# Altium PCB AMX_v30.PcbDoc
Units mil, origin at the board's own origin, x right, y up, seen from the top; angles counter-clockwise.
Board outline 2747.05 x 1800.98 mil, 4 copper layers (Top Layer, Internal Plane 1, Internal Plane 2, Bottom Layer), stack 30.634 mil thick; 78 components, 60 nets, 302 pads, 54 vias.
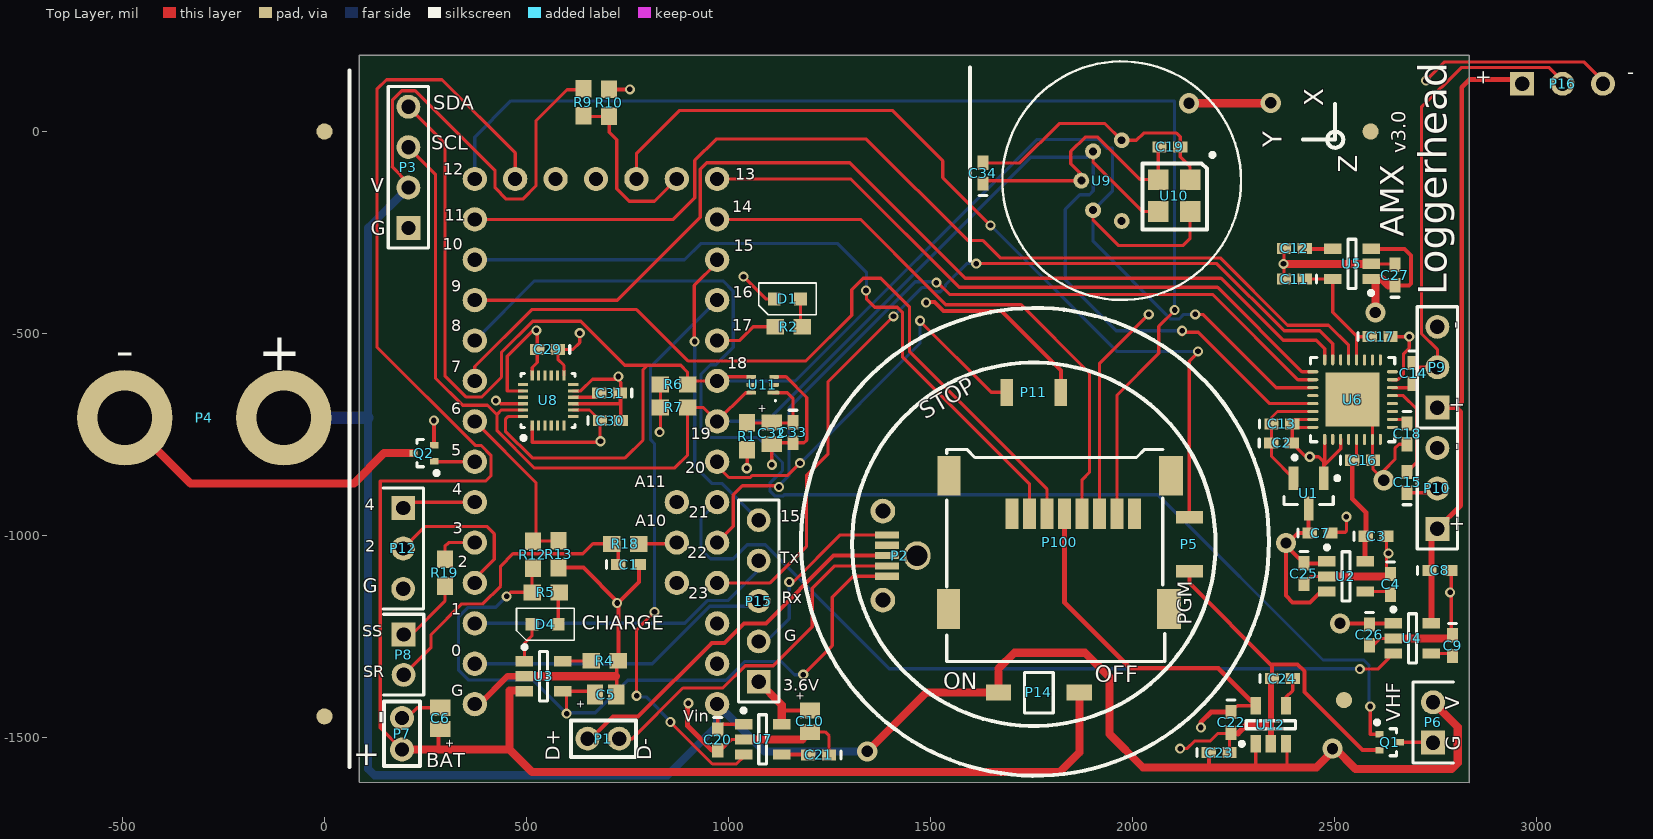
[diagram p0: Top Layer view]
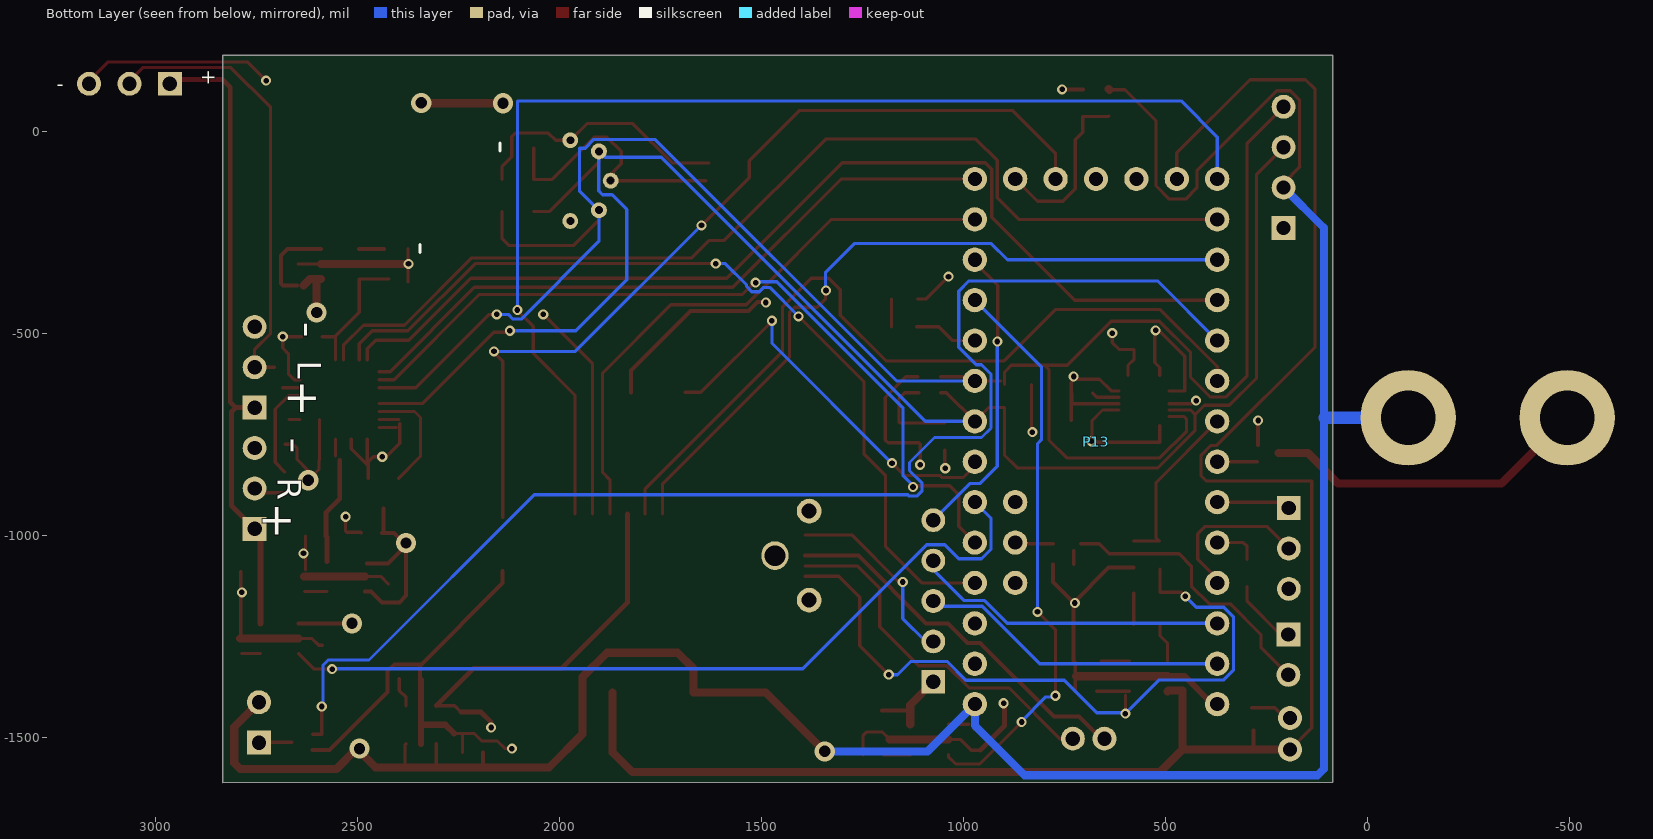
[diagram p1: Bottom Layer view, seen from below]
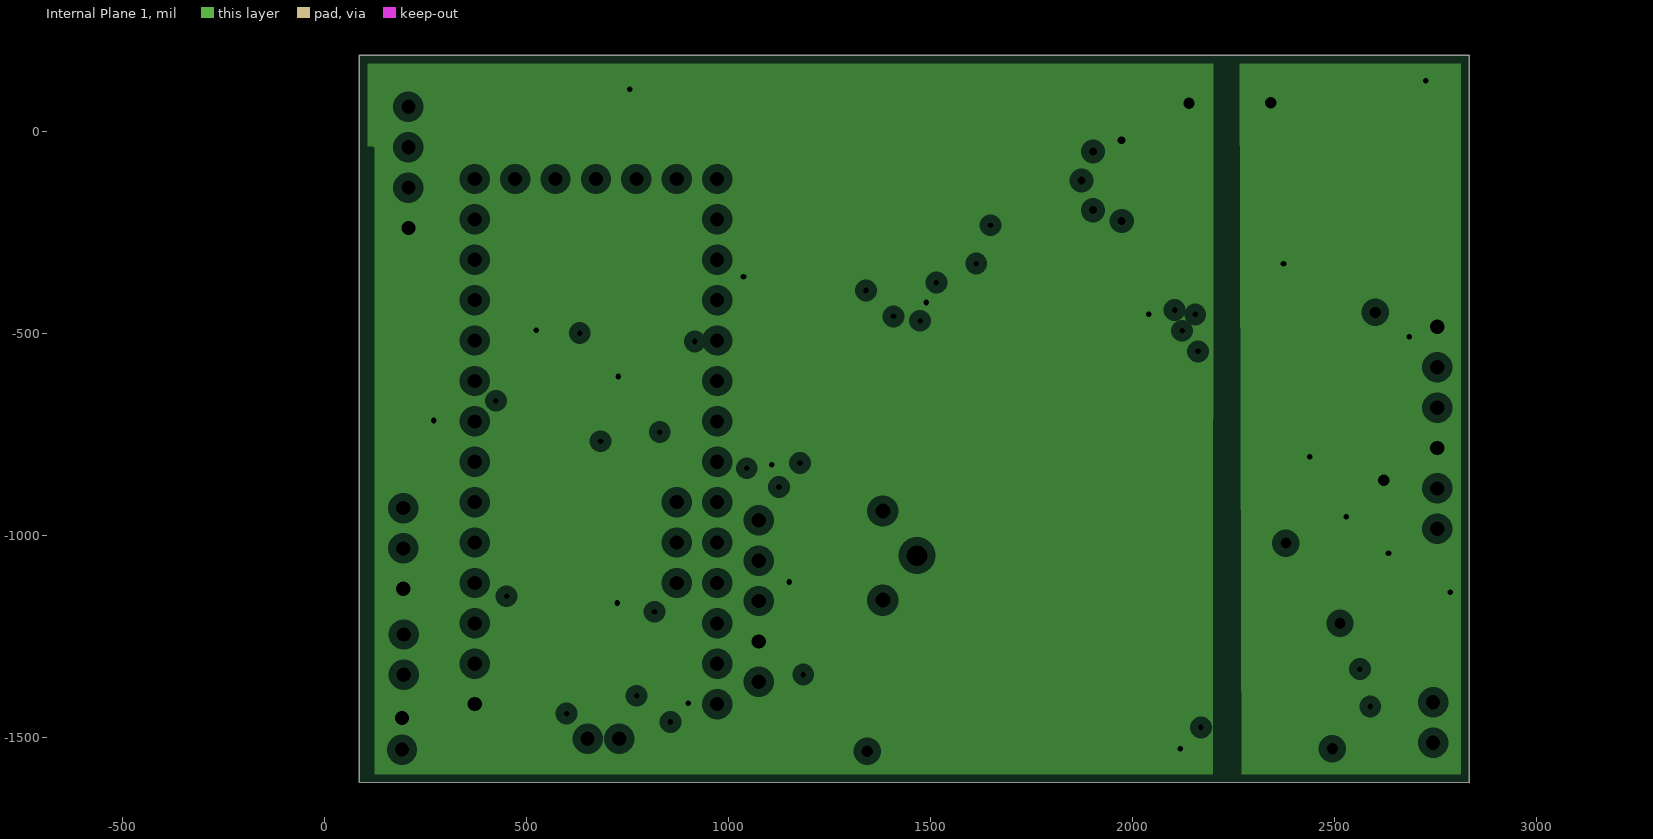
[diagram p2: Internal Plane 1, clearances drawn from the general rule]
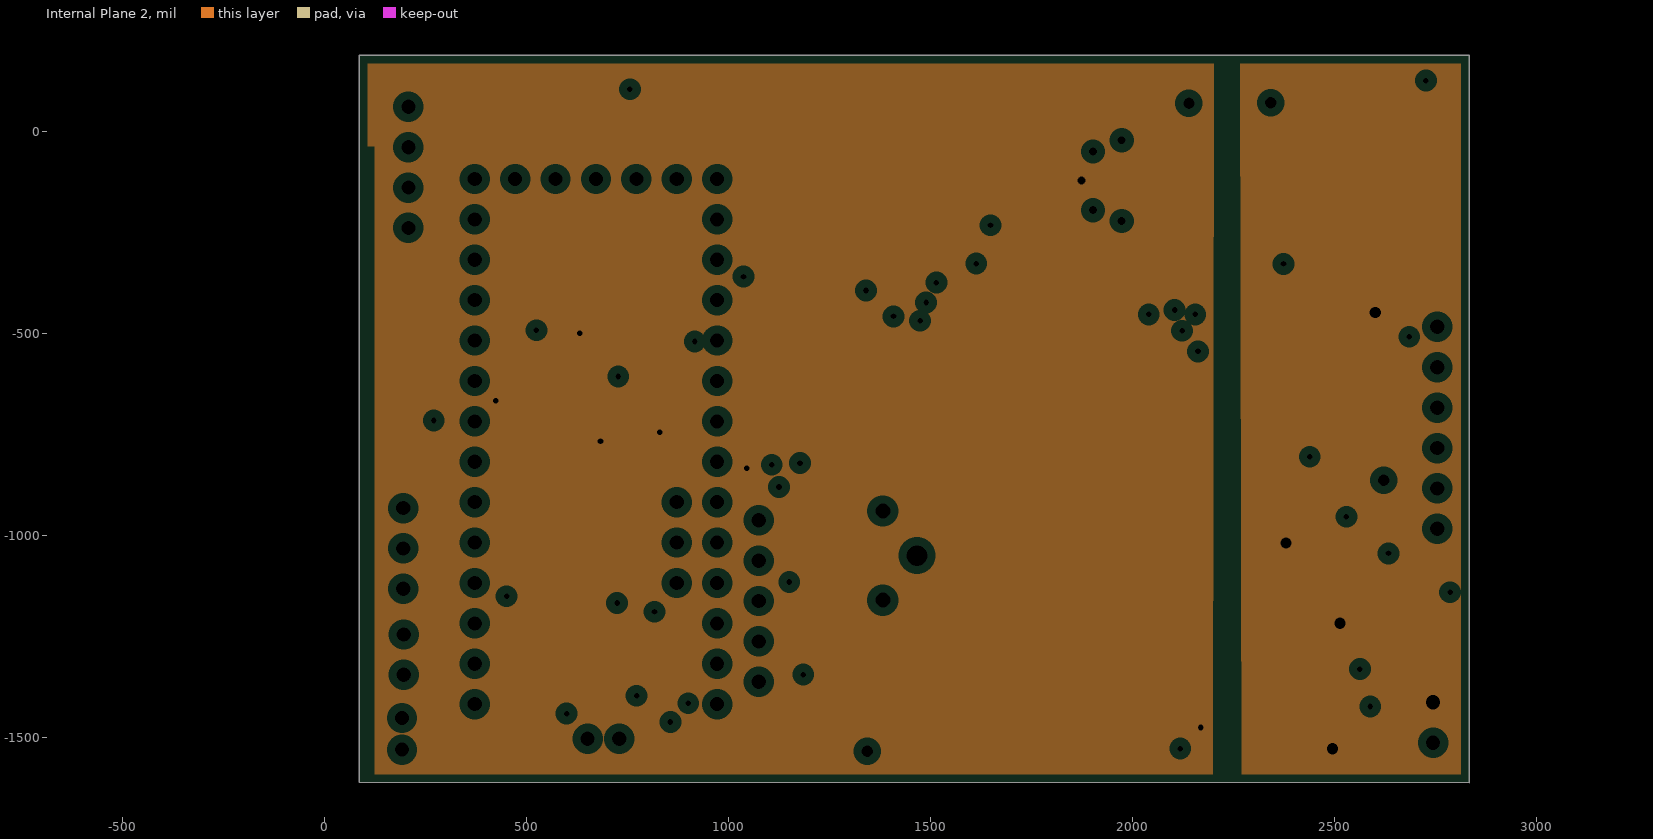
[diagram p3: Internal Plane 2, clearances drawn from the general rule]

## Layer stack, top to bottom
Top Solder: solder mask 0.4, Solder Resist, Dk 3.5
Top Layer: signal copper 1.4
Dielectric 1: core 10, FR-4, Dk 4.2
Internal Plane 1: plane copper 1.417, net DGND
Dielectric 3: prepreg 5, Dk 4.2
Internal Plane 2: plane copper 1.417, net (Multiple Nets)
Dielectric 2: core 10, Dk 4.2
Bottom Layer: signal copper 1.4
Bottom Solder: solder mask 0.4, Solder Resist, Dk 3.5

## Board outline
86.61,-1611.22 86.61,188.78 2833.66,188.78 2833.66,-1612.2

## Design rules (kind name [scope] priority, off if disabled: settings)
Clearance [All] p1: gap=6
HoleToHoleClearance [All] p1: gap=6 allowstackedmicrovias=TRUE
MinimumSolderMaskSliver [All] p1: minsoldermaskwidth=6
PlaneClearance [All] p1: clearance=20
PlaneConnect [All] p1: planeconnectstyle=Relief reliefexpansion=20 reliefentries=4 reliefconductorwidth=10 reliefairgap=10
PolygonConnect [All] p1: connectstyle=Relief reliefconductorwidth=10 reliefentries=4 polygonreliefangle="90 Angle" airgapwidth=10
RoutingVias [All] p1: holewidth=28 width=50 viastyle="Through Hole" minholewidth=10 minwidth=10 maxholewidth=100 maxwidth=200
SilkToSilkClearance [All] p1: silktosilkclearance=0
SilkToSolderMaskClearance [IsPad] p1: minsilkscreentomaskgap=2 clearancetoexposedcopper=TRUE
SolderMaskExpansion [All] p1: expansion=4
Width Width_1 [All] p1: maxlimit=50 minlimit=6 preferedwidth=8
Width [All] p2: maxlimit=100 minlimit=6 preferedwidth=10
23 further rules are at their usual default settings.

## Classes and differential pairs
component class AMX30: C2 C3 C4 C5 C6 C7 C8 C9 C10 C11 C12 C20 C21 C22 C23 C24 C25 C26 C27 D1 D4 P1 P2 P3 P5 P7 P11 P13 P14 P100 R2 R4 R5 R9 R10 R12 R13 U1 U2 U3 U4 U5 U7 U12
component class AMX_sensors30: C1 C19 C29 C30 C31 C32 C33 C34 P4 P6 P8 P12 P15 Q1 Q2 R1 R6 R7 R18 R19 U8 U9 U10
component class AMX_audio30: C13 C14 C15 C16 C17 C18 P9 P10 P16 U6

## Components (designator, comment, footprint, x,y, rotation, side; value= is the part's Value field where it differs from the comment)
C1 "1.0uF" 0402#1 752.95,-1071.85 r0 top
C2 "1.0uF" 0402#1 2369.09,-770.67 r0 top
C3 "1.0uF" 0402#1 2603.35,-1001.97 r0 top
C4 "10nF" 0402#1 2638.78,-1121.06 r270 top
C5 "1uF" Tant0805 695.87,-1393.7 r180 top
C6 "1uF" Tant0805 286.42,-1452.76 r270 top
C7 "1.0uF" 0402#1 2464.57,-994.09 r0 top
C8 "1.0uF" 0402#1 2760.83,-1086.61 r0 top
C9 "10nF" 0402#1 2792.32,-1272.64 r270 top
C10 "10uF" Tant0805 1201.77,-1459.65 r90 top
C11 "1.0uF" 0402#1 2400.59,-365.16 r180 top
C12 "10nF" 0402#2 2400.59,-289.37 r180 top
C13 "0.1uF" 0402#1 2369.85,-723.61 r0 top
C14 "1.0uF" 0402#1 2694.84,-598.62 r270 top
C15 "1.0uF" 0402#1 2679.84,-868.62 r90 top
C16 "0.1uF" 0402#1 2569.84,-813.62 r0 top
C17 "0.1uF" 0402#1 2613.19,-507.87 r0 top
C18 "0.1uF" 0402#1 2679.85,-748.61 r270 top
C19 "0.1uF" 0402#2 2092.52,-38.39 r0 top
C20 "1.0uF" 0402#1 973.43,-1505.91 r270 top
C21 "470pF" 0402#1 1223.43,-1543.31 r180 top
C22 "1.0uF" 0402#1 2244.09,-1462.6 r270 top
C23 "1.0uF" 0402#1 2214.57,-1537.4 r0 top
C24 "10nF" 0402#1 2371.06,-1354.33 r0 top
C25 "1.0uF" 0402#1 2424.21,-1094.49 r270 top
C26 "1.0uF" 0402#1 2586.61,-1246.06 r270 top
C27 "1.0uF" 0402#1 2649.61,-355.31 r90 top
C29 "0.1uF" 0402#1 552.17,-539.37 r180 top
C30 "10nF" 0402#1 707.68,-715.55 r0 top
C31 "0.1uF" 0402#1 705.71,-647.64 r180 top
C32 "1uF" Tant0805 1107.28,-747.05 r90 top
C33 "0.1uF" 0402#1 1159.45,-745.08 r270 top
C34 "0.1uF" 0402#1 1629.92,-103.35 r90 top
D1 "LED_0603" Diode0603 1145.67,-414.37 r180 top
D4 "LED_0603" Diode0603 546.26,-1219.49 r180 top
P1 "USB" HDR_2x1_2mm 650.59,-1502.95 r270 top
P2 "microUSB-vert" MICROUSB-VERT 1392.05,-1100.98 r90 top
P3 "Display" HDR1X4 207.8,-238.78 r90 top
P4 "Burn" BURN -100.39,-708.66 r180 top
P5 "Tactile" Tactile-B3U-1000 2140.75,-1021.65 r90 top
P6 "VHF Power" HDR1X2 2744.09,-1512.8 r90 top
P7 "Battery _2mm" HDR_2x1_2mm 191.93,-1530.51 r0 top
P8 "Salt Switch" HDR1X2 195.87,-1245.08 r270 top
P9 "HYDROPHONE" HDR1X3 2754.84,-683.62 r90 top
P10 "HYDROPHONE" HDR1X3 2754.84,-983.62 r90 top
P11 "Tactile" Tactile-B3U-1000 1755.91,-645.67 r180 top
P12 "Header 3" HDR1X3 194.88,-932.09 r270 top
P13 "Teensy3.x" Teensy3.x 372.05,-1217.52 r180 bottom
P14 "DIP1" DIP1 1868.43,-1388.38 r180 top
P15 "Header 5" HDR1X5 1074.8,-1362.2 r90 top (schematic designator P9)
P16 "HYDROPHONE" HDR1X3 2964.57,118.11 r0 top
P100 "microSD-Molex" microSD_Molex_hinged 2075.12,-851.97 r270 top
Q1 "DMN5L06TK-7" SOT-523 2636.81,-1511.81 r0 top
Q2 "DMN5L06TK-7" SOT-523 246.06,-796.26 r180 top
R1 "100x" 3-0603 1046.26,-754.92 r90 top
R2 "330" 3-0603 1149.61,-483.27 r0 top
R4 "2k" 3-0603 693.9,-1310.04 r180 top
R5 "330" 3-0603 547.24,-1140.75 r0 top
R6 "4.7k" 3-0603 865.16,-625.98 r0 top
R7 "4.7k" 3-0603 865.16,-683.07 r180 top
R9 "100k" 3-0603 640.75,71.85 r90 top
R10 "100k" 3-0603 704.72,70.87 r270 top
R12 "100k" 3-0603 515.75,-1047.24 r90 top
R13 "100k" 3-0603 579.72,-1046.26 r270 top
R18 "10k" 3-0603 744.09,-1020.67 r180 top
R19 "1k" 3-0603 298.23,-1092.52 r90 top
U1 "MCP1700T-1802E/TT" SOT-23-TT3_N 2436.02,-895.67 r270 top
U2 "LP3985IM5-3.3" MF05A_N 2528.54,-1101.38 r0 top
U3 "MCP73831T-2DCI/OT" SOT-23-OT5_N 542.32,-1348.43 r0 top
U4 "LP3985IM5-3.3" MF05A_N 2692.91,-1254.92 r0 top
U5 "LP3985IM5-3.3" MF05A_N 2543.31,-327.76 r180 top
U6 "SGTL5000" QFN32 2544.85,-663.61 r90 top
U7 "3.6V LDO" MF05A_N 1084.65,-1504.92 r0 top
U8 "MPU9250" MPU6500 553.57,-665.85 r90 top
U9 "Keller7LD" Keller7LD 1973.43,-21.65 r270 top
U10 "MS5837" MS5837 2142.72,-119.09 r270 top
U11 "RGB light" ODFN 1084.65,-626.97 r180 top
U12 "LP3985IM5-3.3" MF05A_N 2342.52,-1468.5 r90 top

## Footprints (in the part's own frame and the unit in brackets; to place one, negate y for a bottom-side part, rotate by r counter-clockwise, add the part's x,y. Pads: shape width x height; smd on the part's side, far side on the other; paste and mask are expansions set on the pad)
3-0603 [mm] "Chip Resistor; Body 1.6 x 0.9 mm (LxW typ)"
  rect 1.1x1 smd: 1(-0.85,0) 2(0.85,0)
0402#1 [mm] "Chip Capacitor; Body 1.0 x 0.5 mm (LxW typ)"
  rect 0.9x0.7 smd: 1(-0.65,0) 2(0.65,0)
  silkscreen extent -1.4,-0.25 -1.4,0.25
0402#2 [mm] "Chip Capacitor; Body 1.0 x 0.5 mm (LxW typ)"
  rect 0.9x0.7 smd: 1(0.65,0) 2(-0.65,0)
BURN [mm]
  round 6 hole 3.42: 1(0,0) 2(10,0)
Diode0603 [mm]
  rect 0.8x0.8 smd: A(-0.825,0) K(0.825,0)
  silkscreen extent -1.83,-1 1.8,1
DIP1 [mm]
  rect 1.6x1 smd: 1(0,0) 2(5.08,0)
  silkscreen extent 1.63,-1.25 3.45,1.29
HDR1X2 [mm] "Connector; Header; 2 Position"
  rect 1.5x1.5 hole 0.9: 1(0,0)
  round 1.5 hole 0.9: 2(2.54,0)
  silkscreen extent -1.27,-1.27 3.81,1.27
HDR1X3 [mm] "Connector; Header; 3 Position"
  rect 1.5x1.5 hole 0.9: 1(0,0)
  round 1.5 hole 0.9: 2(2.54,0) 3(5.08,0)
  silkscreen extent -1.27,-1.27 6.35,1.27
HDR1X4 [mm] "Connector; Header; 4 Position"
  rect 1.5x1.5 hole 0.9: 1(0,0)
  round 1.5 hole 0.9: 2(2.54,0) 3(5.08,0) 4(7.62,0)
  silkscreen extent -1.27,-1.27 8.89,1.27
HDR1X5 [mm] "Connector; Header; 5 Position"
  rect 1.5x1.5 hole 0.9: 1(0,0)
  round 1.5 hole 0.9: 2(2.54,0) 3(5.08,0) 4(7.62,0) 5(10.16,0)
  silkscreen extent -1.27,-1.27 11.43,1.27
HDR_2x1_2mm [mm]
  round 1.5 hole 0.9: 1(0,0.016) 2(0,2)
  silkscreen extent -1.14,-1.02 1.14,3.05
Keller7LD [mm]
  round 1 hole 0.5: 1(5.08,0) 2(4.4,-1.8) 3(2.54,-2.54) 4(0.7,-1.8) 5(0,0)
  silkscreen extent -4.96,-7.5 10.04,7.5, body extent -4.94,-7.49 10,7.49, height 5.25
MF05A_N [mm] "SOT23, 5-Leads, Body 2.9x1.6mm, Pitch 0.95mm, Lead Span 2.8mm, IPC Medium Density"
  rect 1.1x0.65 smd: 1(-1.2,0.95) 2(-1.2,0) 3(-1.2,-0.95) 4(1.2,-0.95) 5(1.2,0.95)
  silkscreen extent -1.32,-1.55 0.25,1.95, body extent -0.9,-1.55 0.9,1.55, height 1.19
microSD_Molex_hinged [mm]
  rect 2.5x1.5 smd: 0(0,0.508) 0(8.382,0.381)
  rect 2.5x1.45 smd: 0(0,-13.45) 0(8.382,-13.462)
  rect 1.9x0.8 smd: 1(2.4,-9.475) 2(2.4,-8.375) 3(2.4,-7.275) 4(2.4,-6.175) 5(2.4,-5.075) 6(2.4,-3.975) 7(2.4,-2.875) 8(2.4,-1.775)
  silkscreen extent -1.65,-13.59 11.68,0.13
MICROUSB-VERT [mm] "Molex 05133-0011"
  rect 0.45x1.5 smd: 1(0,0) 2(0.65,0) 3(1.3,0) 4(1.95,0) 5(2.6,0)
  round 1.55 hole 0.95: ""(-1.5,0.25) ""(4.1,0.25)
  oval 1.8x1.7 hole 1.3: ""(1.3,-1.9)
  body extent -2.67,-3.05 5.35,1.4, height 7.53
MPU6500 [mm] "QFN, 24-Leads, Body 3.00x3.00mm, Pitch 0.40mm, Thermal Pad 1.54x1.54mm, IPC Medium Density"
  rect 0.65x0.2 smd: 1(-1.575,1) 2(-1.575,0.6) 3(-1.575,0.2) 4(-1.575,-0.2) 5(-1.575,-0.6) 6(-1.575,-1) 13(1.575,-1) 14(1.575,-0.6) 15(1.575,-0.2) 16(1.575,0.2) 17(1.575,0.6) 18(1.575,1)
  rect 0.2x0.65 smd: 7(-1,-1.575) 8(-0.6,-1.575) 9(-0.2,-1.575) 10(0.2,-1.575) 11(0.6,-1.575) 12(1,-1.575) 19(1,1.575) 20(0.6,1.575) 21(0.2,1.575) 22(-0.2,1.575) 23(-0.6,1.575) 24(-1,1.575)
  silkscreen extent -2.47,-1.7 1.7,1.7, body extent -1.85,-1.25 1.25,1.85, height 0.9
MS5837 [mm]
  rect 1.3x1.3 smd: 1(0,0) 2(0,-2) 3(2,-2) 4(2,0)
  silkscreen extent -1.67,-3 3.15,1.52
ODFN [mm]
  rrect50% 0.75x0.25 smd: 1(-0.67,0.5)
  rrect50% 0.6x0.25 smd: 2(-0.72,0) 3(-0.72,-0.5) 4(0.72,-0.5) 5(0.72,0) 6(0.72,0.5)
  silkscreen extent -0.85,0.95 -0.75,1.05, body extent -0.82,-0.82 0.82,0.82, height 0.7
QFN32 [mm]
  oval 0.7x0.2 smd: 1(-2.5,1.75) 2(-2.5,1.25) 3(-2.5,0.75) 4(-2.5,0.25) 5(-2.5,-0.25) 6(-2.5,-0.75) 7(-2.5,-1.25) 8(-2.5,-1.75) 17(2.5,-1.75) 18(2.5,-1.25) 19(2.5,-0.75) 20(2.5,-0.25) 21(2.5,0.25) 22(2.5,0.75) 23(2.5,1.25) 24(2.5,1.75)
  oval 0.2x0.7 smd: 9(-1.75,-2.5) 10(-1.25,-2.5) 11(-0.75,-2.5) 12(-0.25,-2.5) 13(0.25,-2.5) 14(0.75,-2.5) 15(1.25,-2.5) 16(1.75,-2.5) 25(1.75,2.5) 26(1.25,2.5) 27(0.75,2.5) 28(0.25,2.5) 29(-0.25,2.5) 30(-0.75,2.5) 31(-1.25,2.5) 32(-1.75,2.5)
  rect 3.4x3.4 smd paste-1.2: 33(0,0)
  silkscreen extent -3.77,-2.65 2.65,3.76, body extent -2.5,-2.5 2.5,2.5, height 1
SOT-23-OT5_N [mm] "SOT23, 5-Leads, Body 2.9x1.7mm, Pitch 0.95mm, Lead Span 2.8mm, IPC Medium Density"
  rect 1.1x0.65 smd: 1(-1.2,0.95) 2(-1.2,0) 3(-1.2,-0.95) 4(1.2,-0.95) 5(1.2,0.95)
  silkscreen extent -1.32,-1.55 0.25,1.95, body extent -0.9,-1.55 0.9,1.55, height 1.45
SOT-23-TT3_N [mm] "SOT23, 3-Leads, Body 2.9x1.3mm, Pitch 0.95mm, Lead Span 2.4mm, IPC Medium Density"
  rect 1.5x0.6 smd: 1(-0.95,0.95) 2(-0.95,-0.95) 3(0.95,0)
  silkscreen extent -1.07,-1.55 0.7,1.93, body extent -0.7,-1.52 0.7,1.53, height 1.12
SOT-523 [mm] "For Diodes Inc MOSFET DMN5L06TK"
  rect 0.51x0.4 smd: 1(-0.65,0.5) 2(-0.65,-0.5) 3(0.65,0)
  silkscreen extent -0.92,-0.85 0.42,1.37, body extent -0.43,-0.85 0.42,0.85, height 0.8
Tactile-B3U-1000 [mm]
  rect 0.8x1.7 smd: 1(-1.7,0) 2(1.7,0)
Tant0805 [mil]
  rect 40x50 smd: 1(-26.5,0) 2(26.5,0)
Teensy3.x [mil]
  round 60 hole 35: 0(0,-100) 1(0,0) 2(0,100) 3(0,200) 3.3V(-600,0) 3.3V2(-200,1100) 4(0,300) 5(0,400) 6(0,500) 7(0,600) 8(0,700) 9(0,800) 10(0,900) 11(0,1000) 12(0,1100) 13(-600,1100) 14(-600,1000) 15(-600,900) 16(-600,800) 17(-600,700) 18(-600,600) 19(-600,500) 20(-600,400) 21(-600,300) 22(-600,200) 23(-600,100) A10(-500,200) A11(-500,300) A14(-500,1100) AGND(-600,-100) AREF(-500,100) GND(0,-200) GND2(-300,1100) PGM(-400,1100) VBat(-100,1100) Vin(-600,-200)

## Part data
C1 C2 C3 C4 C7 C8 C9 C11 C12 C13 C14 C15 C16 C17 C18 C19 C20 C21 C22 C23 C24 C25 C26 C27 C29 C30 C31 C33 C34: library part C0402, "Ceramic Chip Capacitor - Standard"
C5 C6 C10 C32: library part Tant0805
P1 P7: library part HDR_2x1_2mm, "Charging Connector"
P2: "Molex 105133-0011"
P3: library part "Header 4", "Header, 4-Pin"
P4: library part "Burn Screw"
P5 P11: library part Tactile_B3U-1000
P6 P8: library part "Header 2", "Header, 2-Pin"
P9 P10 P16: library part "Header 3", "Header, 3-Pin"
P12: "Header, 3-Pin"
P15: "Header, 5-Pin"
P100: library part microSD_Molex_hinged
Q1 Q2: library part "FET DMN5L06TK-7", "Ultra-low leakage Enhanced MOSFET"
R1 R2 R4 R5 R6 R7 R9 R10 R12 R13 R18 R19: library part ERJ3RK, "Precision Thick Film Chip Resistor, 10 Ohm to 1M Ohm Range, 1% and 0.5% Tolerance, 0603 Size, 0.063 W"
U1: "Low Quiescent Current LDO, 3-Pin SOT-23, Extended Temperature, Tape and Reel"
U2 U4 U5 U12: "Micropower, 150mA Low-Noise Ultra Low-Dropout CMOS Voltage Regulator"
U3: "Miniature Single-Cell, Fully Integrated Li-Ion, Li-Polymer Charge Management Controller, 4.2V, 5-Pin SOT-23, Industrial Temperature, Tape and Reel"
U7: library part LP3985IM5-3.3, "Micropower, 150mA Low-Noise Ultra Low-Dropout CMOS Voltage Regulator"
U8: library part MPU-9250, "Invensense"
U9: library part "Keller 7LD", "Keller Pressure/Temp"
U10: "Pressure/Temp"
U11: library part ISL29125, "RGB light sensor"

## Free pads (board coordinates)
  round 40 smd paste-20 mask+5: 0(0,-1447.83) 0(0,0) 0(2523.62,-1407.48) 0(2589.57,0)

## Via types
v1: diameter 25, hole 14, Top Layer to Bottom Layer, 46 vias
v2: diameter 50, hole 28, Top Layer to Bottom Layer, 8 vias

## Nets (pads, with @x,y where several pads share a name; then routed paths per layer and width w, separated by ;. In a path a pad name is that pad's centre, name@x,y a point inside that pad or via, vN(x,y) a via of type N, cw(c..) or ccw(c..) an arc to the next point about the centre after c; other vN are vias at no path point)
AGND: C2.2 C3.2 C4.1 C7.2 C8.2 C9.1 C11.2 C12.1 C13.2 C16.2 C17.2 C18.2 C25.2 C26.2 C27.2 P9.3 P10.3 P16.3 U1.1 U2.2 U4.2 U5.2 U6.1 U6.3 U6.7 U6.15 U6.31 U6.32 U6.33 | length 2451.6
  Top Layer w8: C11.2@2375,-372.05 C11.2 2375,-318.9 C12.1 ; C2.2 2429.13,-805.12 v1(2438.98,-805.12) 2460.63,-805.12 2473.43,-817.91 U1.1 ; C2.2@2395.44,-769.91 C13.2 ; C13.2@2397.86,-712.82 U6.31 ; C13.2@2404.34,-732.51 U6.32 ; C25.2 2442.91,-1101.38 U2.2 ; U6.1 2475.96,-824.8 2515.33,-785.43 U6.3 ; C7.2 2492.13,-992.13 2526.57,-992.13 2529.53,-989.17 v1(2529.53,-953.74) ; C26.2 2596.46,-1271.65 2613.19,-1254.92 U4.2 ; U5.2 C27.2@2647.64,-327.76 ; C16.2@2594.07,-812.26 U6.7 U6.33@2594.07,-712.82 ; C16.2 2595.43,-836.57 v2(2622.05,-863.19) 2622.05,-839.57 2649.61,-812.01 2649.61,-784.45 2659.86,-774.2 C18.2 ; C4.1@2628.94,-1085.63 C3.2 ; C17.2 v1(2685.04,-507.87) 2685.04,-536.01 2671.06,-549.99 2671.06,-599.61 2656.27,-614.4 U6.15 ; v1(2726.38,125.98) 2772.64,172.24 3117.32,172.24 P16.3@3160.63,128.94 ; C9.1@2789.37,-1248.03 C8.2@2789.37,-1089.57
  Top Layer w20: v1@2375.98,-327.76 U5.2 ; U2.2 C4.1@2632.87,-1101.38 ; U4.2 C9.1@2790.35,-1254.92
  other v1: 2786.42,-1140.75 2633.86,-1044.29 2374.02,-327.76
  other v2: 2342.52,70.87
BCLK: P13.9 U6.24 | length 2532.4
  Top Layer w8: P13.9 725.2,-417.52 930.34,-212.38 930.34,-93.28 946.1,-77.52 1299.96,-77.52 1585.63,-363.19 2219.49,-363.19 2373.03,-516.73 2454.72,-516.73 2475.96,-537.96 U6.24
BURN: P13.5 Q2.1 | length 98.8
  Top Layer w8: Q2.1@273.23,-817.52 P13.5
BURN_GND: P4.2 Q2.3 | length 812.8
  Top Layer w20: P4.2 -331.69,-871.06 72.83,-871.06 147.64,-796.26 Q2.3
CAM_SW: P12.1 P13.4 | length 183.2
  Top Layer w8: P12.1 209.45,-917.52 P13.4
CS: P13.10 P100.2 | length 1813.2
  Top Layer w8: v1@1341.54,-394.69 1341.54,-414.37 1362.34,-435.18 1417.78,-435.18 1430.96,-448.36 1430.96,-558.92 1745.4,-873.35 P100.2
  Bottom Layer w8: P13.10 891.14,-317.52 931.14,-277.52 1270.63,-277.52 1341.54,-348.43 v1@1341.54,-394.69
  other v1: 1340.55,-393.7
D2: P12.2 P13.2 | length 397.1
  Top Layer w8: P12.2 249.45,-977.52 401.73,-977.52 420.28,-996.06 420.28,-1059.06 372.05,-1107.28 P13.2
D15: P13.15 P15.5 | length 749.4
  Top Layer w8: v1@915.35,-520.67 915.35,-380.91 972.05,-324.21 P13.15
  Bottom Layer w8: v1(916.34,-519.69) 916.34,-828.74 958.66,-871.06 983.66,-871.06 P15.5
D+: P1.1 P2.3 | length 937
  Top Layer w10: P1.1@659.45,-1502.95 714.57,-1447.83 776.57,-1447.83 958.66,-1265.75 990.2,-1265.75 1038.43,-1217.52 1092.52,-1217.52 1260.24,-1049.8 P2.3
  Top Layer w20: P1.1@651.22,-1494.45 P1.1 P1.1@659.45,-1502.95
D-: P1.2 P2.2 | length 895.7
  Top Layer w8: P1.2 761.81,-1502.95 887.24,-1377.52 986.29,-1377.52 1041.13,-1322.68 1111.38,-1322.68 1207.68,-1226.38 1207.68,-1130.91 1263.19,-1075.39 P2.2
DGND: C1.2 C5.1 C6.1 C10.1 C19.1 C20.2 C21.1 C22.2 C23.2 C24.1 C29.2 C30.2 C31.1 C32.1 C33.2 C34.2 D1.K P2.5 P3.1 P5.1 P7.2 P11.1 P12.3 P13.GND P15.2 P100.6 Q1.2 Q2.2 R4.1 R10.1 R13.2 U3.2 U7.2 U8.9 U8.11 U8.18 U8.20 U9.5 U10.1 U11.3 U12.2 | length 6143.7
  Top Layer w8: P7.2 203.74,-1451.77 229.26,-1426.26 C6.1 ; P13.GND P13.GND@383.66,-1417.52 ; U8.20 452.27,-642.23 452.27,-556.59 514.76,-494.09 526.57,-494.09 C29.2 526.57,-571.85 514.2,-584.23 U8.18 ; U8.9 728.83,-673.72 731.3,-671.26 C31.1 ; U8.11 634.35,-642.23 663.39,-613.19 725.39,-613.19 733.27,-621.06 C30.2 ; C5.1@723.35,-1385.83 R4.1@723.35,-1314.05 ; v1@898.62,-1421.26 v1@904.53,-1415.35 ; 958.66,-1531.5 C20.2 981.3,-1531.5 1007.87,-1504.92 U7.2 ; v1(1037.4,-359.25) 1092.52,-414.37 D1.K ; v1(1107.28,-824.8) C32.1 ; C32.1@1110.16,-770.67 C33.2 1187.01,-770.67 1193.9,-763.78 1193.9,-658.46 1142.72,-607.28 U11.3 ; v1@1150.59,-1117.13 1158.46,-1117.13 1276.97,-998.62 P2.5 ; C10.1@1183,-1504.92 C10.1 1239.1,-1486.15 1249.02,-1496.06 C21.1 ; C34.2 1721.46,-77.76 1818.9,19.69 1932.09,19.69 U9.5 2009.84,-21.65 2027.56,-3.94 2109.25,-3.94 2118.11,-12.8 C19.1 2118.11,-62.99 2142.72,-87.6 U10.1 ; P100.6 1918.63,-573.5 v1@2042.32,-449.8 ; v1(2118.11,-1527.56) 2134.84,-1527.56 2153.54,-1508.86 2191.93,-1508.86 2210.63,-1490.16 2260.83,-1490.16 ; C23.2 C22.2@2240.16,-1492.13
  Top Layer w10: Q2.2 v1@271.65,-716.54 ; R13.2 640.75,-1079.72 v1@726.38,-1165.35 ; R10.1 v1(755.91,104.33) ; R4.1 727.36,-1166.34 778.54,-1115.16 C1.2 ; v1@1490.16,-422.24 1509.96,-422.24 1531.85,-444.13 1675.43,-444.13 1822.83,-591.54 P11.1 ; P5.1 2140.75,-1118.11 2345.47,-1322.83 C24.1 2345.47,-1318.9 2408.27,-1318.9 2425.37,-1335.99 2425.37,-1386.98 2569.88,-1531.5 Q1.2
  Top Layer w12: v1@898.62,-1421.26 898.62,-1471.46 958.66,-1531.5
  Top Layer w15: P13.GND@383.66,-1417.52 452.76,-1348.43 U3.2 ; 2260.83,-1490.16 2282.48,-1468.5 2342.52,-1468.5 ; U12.2 2342.52,-1468.5 ; C24.1@2342.52,-1357.28 2342.52,-1468.5
  Top Layer w20: U3.2 721.38,-1348.43 ; U7.2 C10.1@1183,-1504.92
  Bottom Layer w8: P15.2 1094.09,-1262.2 1150.59,-1205.71 v1(1150.59,-1115.16)
  other v1: 900.59,-1415.35 724.41,-1167.32 270.67,-715.55 727.36,-606.3 524.61,-492.13 2040.35,-452.76 1489.17,-423.23
  other v2: 2139.76,69.88
HL: C14.1 P9.2 P16.2 | length 1107.3
  Top Layer w8: C14.1@2705.43,-583.62 P9.2 2754.84,-539.52 2715.31,-499.99 2715.31,59.8 2813.58,158.07 3031.5,158.07 P16.2@3060.63,128.94
HYDRO_EN: P13.21 U4.3 | length 2015
  Top Layer w8: v1(2562.99,-1330.71) 2607.28,-1330.71 U4.3
  Bottom Layer w8: P13.21 932.05,-957.52 932.05,-1034.09 955.48,-1057.52 1011.84,-1057.52 1046.69,-1022.68 1091.18,-1022.68 1398.22,-1329.72 v1@2563.98,-1329.72
I2SDIN: P13.22 U6.26 | length 2009.8
  Top Layer w8: P13.22 1012.05,-977.52 1012.05,-899.37 1034.45,-876.97 v1@1125,-876.97 ; v1@1516.73,-373.03 1547.24,-403.54 2198.82,-403.54 2409.67,-614.4 U6.26 U6.26@2445.67,-615.16
  Bottom Layer w8: P13.22 P13.22@972.05,-992.52 ; v1@1125,-876.97 1149.61,-852.36 1149.61,-684.72 1462.27,-372.05 v1@1514.76,-372.05
  other v1: 1125,-879.92 1514.76,-374.02
I2SDOUT: P13.13 U6.25 | length 1672
  Top Layer w8: P13.13 1302.56,-117.52 1570.87,-385.83 2210.63,-385.83 2419.51,-594.71 U6.25
IN_L: C14.2 U6.14 | length 41.7
  Top Layer w8: U6.14 C14.2@2684.97,-634.08
IN_R: C15.2 U6.13 | length 240.1
  Top Layer w8: U6.13 2670.5,-653.77 2703.63,-686.9 2703.63,-819.24 C15.2
LED1: P13.17 R2.1 | length 158.3
  Top Layer w8: P13.17 1026.77,-517.52 1061.02,-483.27 R2.1
LINE_IN_R: C15.1 P10.2 | length 79.4
  Top Layer w8: C15.1 2744.25,-894.21 P10.2
LRCLK: P13.23 U6.23 | length 2191.9
  Top Layer w8: P13.23 1102.95,-1117.52 1192.91,-1027.56 1192.91,-852.36 1246.06,-799.21 1246.06,-620.08 v1(1408.46,-457.68) ; v1(1613.41,-326.99) 2208.88,-326.99 2375.22,-493.33 2463.8,-493.33 2495.64,-525.17 U6.23
  Bottom Layer w8: v1(1408.46,-457.68) 1480.09,-386.05 1494.98,-386.05 1505.44,-396.52 1524.08,-396.52 1537.26,-383.34 1537.26,-379.07 1589.35,-326.99 v1(1613.41,-326.99)
MCLK: P13.11 U6.21 | length 2547.1
  Top Layer w8: P13.11 863.19,-217.52 916.34,-164.37 916.34,-71.72 969.36,-18.7 1341.54,-18.7 1592.52,-269.69 1628.94,-269.69 1672.24,-312.99 2217.52,-312.99 2383.86,-479.33 2485.24,-479.33 2535.01,-529.11 U6.21
MISO: P13.12 P100.7 | length 2954.4
  Top Layer w8: P100.7 1961.93,-652.24 2065.13,-549.04 2065.13,-482.46 v1@2105.31,-442.27
  Bottom Layer w8: P13.12 372.05,-13.78 461.61,75.79 2104.33,75.79 v1(2104.33,-441.93)
MOSI: P13.7 P100.3 | length 2027.2
  Top Layer w8: P13.7 372.05,-581.69 512.8,-440.94 772.64,-440.94 899.61,-567.91 1191.93,-567.91 1305.12,-454.72 1305.12,-391.73 1333.66,-363.19 1376.97,-363.19 1447.83,-434.06 1447.83,-544.29 1788.39,-884.84 1788.39,-946.13 P100.3
NetC1_1: C1.1 P8.2 R18.2 | length 731.2
  Top Layer w8: P8.2 263.78,-1277.17 263.78,-1245.08 339.57,-1169.29 391.73,-1169.29 435.84,-1125.18 435.84,-1075.97 466.38,-1045.43 639.61,-1045.43 664.37,-1020.67 R18.2 ; C1.1 R18.2@727.36,-1037.4
NetC4_2: C4.2 U2.4 | length 55.1
  Top Layer w8: U2.4 C4.2@2630.91,-1138.78
NetC9_2: C9.2 U4.4 | length 46.3
  Top Layer w8: U4.4 C9.2@2786.42,-1292.32
NetC12_2: C12.2 U5.4 | length 62
  Top Layer w10: C12.2@2434.06,-290.35 U5.4
NetC18_1: C18.1 U6.10 | length 26.4
  Top Layer w8: U6.10 C18.1@2669.66,-712.82
NetC21_2: C21.2 U7.4 | length 65
  Top Layer w10: U7.4 C21.2@1196.85,-1542.32
NetC24_2: C24.2 U12.4 | length 73.9
  Top Layer w8: U12.4 2379.92,-1400.59 2396.65,-1383.86 C24.2
NetC31_2: C31.2 U8.10 | length 68.8
  Top Layer w8: U8.10 669.78,-657.98 C31.2
NetC32_2: C32.2 C33.1 R1.2 U11.1 | length 224.4
  Top Layer w8: R1.2 C33.1@1157.48,-721.46 ; U11.1 1145.67,-646.65 1159.45,-660.43 C33.1
NetD1_A: D1.A R2.2 | length 68.9
  Top Layer w8: R2.2@1178.15,-483.27 D1.A
NetD4_A: D4.A R5.2 | length 76.8
  Top Layer w8: D4.A R5.2@578.74,-1142.72
NetD4_K: D4.K U3.1 | length 99.3
  Top Layer w8: U3.1 495.08,-1266.73 513.78,-1248.03 D4.K
NetP8_1: P8.1 R19.1 | length 173
  Top Layer w8: P8.1 215.55,-1245.08 298.23,-1162.4 R19.1
NetP13_6: P13.6 R12.2 R13.1 | length 425.3
  Top Layer w8: P13.6 523.62,-869.09 523.62,-1005.91 R12.2 R13.1@578.74,-1013.78
NetR4_2: R4.2 U3.5 | length 69.9
  Top Layer w8: U3.5 R4.2@659.45,-1311.02
PGM: P5.2 P13.PGM | length 2179.6
  Top Layer w8: P13.PGM 772.05,-54.72 878.94,52.17 1405.51,52.17 1530.51,-72.83 1530.51,-114.17 v1@1646.65,-230.31 ; P5.2 2140.75,-568.9 v1@2160.43,-549.21
  Bottom Layer w8: v1(1648.62,-232.28) 1960.63,-544.29 v1(2162.4,-544.29)
POW_EN: P13.16 U7.3 | length 1408
  Top Layer w8: v1(772.64,-1396.65) 772.64,-1233.27 v1(816.93,-1188.98) ; v1(856.3,-1461.61) 960.31,-1565.63 1019.69,-1565.63 1037.4,-1547.91 U7.3
  Bottom Layer w8: v1@777.56,-1399.61 796.26,-1399.61 v1@857.28,-1460.63 ; v1@816.93,-1185.04 816.93,-772.82 807.22,-763.12 807.22,-582.34 P13.16
RX: P13.0 P15.3 | length 767.1
  Bottom Layer w8: P13.0 811.42,-1317.52 953.74,-1175.2 1061.81,-1175.2 P15.3
SALT_READ: P13.A10 R18.1 | length 91.3
  Top Layer w8: R18.1 P13.A10@868.9,-1020.67
SALT_SIG: P13.3 R19.2 | length 110
  Top Layer w8: R19.2 298.23,-1026.57 307.28,-1017.52 P13.3
SCK: P13.14 P100.5 | length 1435.3
  Top Layer w8: P13.14 1326.77,-217.52 1492.26,-383.01 1492.26,-383.34 1538.06,-429.13 1724.41,-429.13 1893.7,-598.43 1893.7,-843.5 1875.32,-861.88 P100.5
SCL: P3.3 P13.19 R7.1 U6.29 U8.23 U9.4 U10.3 U11.6 | length 4287.7
  Top Layer w8: P3.3 274.61,-105.58 274.61,-610.24 341.89,-677.52 403.57,-677.52 425.86,-699.8 427.17,-699.8 ; U8.23 437.5,-689.47 427.17,-699.8 ; U11.6 1042.32,-646.65 971.46,-717.52 937.01,-683.07 R7.1 898.62,-801.18 867.13,-832.68 518.7,-832.68 427.17,-741.14 427.17,-699.8 ; U9.4 1902.56,-75.79 2024.61,-197.83 U10.3 ; v1@2123.03,-502.95 2128.94,-497.05 2163.39,-497.05 2339.79,-673.45 U6.29
  Bottom Layer w8: P13.19 1094.49,-717.52 1748.03,-63.98 1887.8,-63.98 U9.4 1903.11,-49.76 1903.11,-147.09 1893.7,-156.5 1870.08,-156.5 1833.66,-192.91 1833.66,-367.13 1959.65,-493.11 v1(2123.03,-493.11)
SDA: P3.4 P13.18 R6.2 U6.27 U8.24 U9.2 U10.4 U11.4 | length 4881.9
  Top Layer w8: P3.4 298.23,-29.21 298.23,-604.33 351.42,-657.52 388.62,-657.52 438.27,-607.87 438.27,-546.64 515.29,-469.63 634.32,-469.63 743.43,-578.74 799.21,-578.74 ; U8.24 455.21,-705.22 447.83,-712.6 447.83,-742.01 513.89,-808.07 744.09,-808.07 788.39,-763.78 788.39,-589.57 799.21,-578.74 ; R6.2 898.62,-595.47 881.89,-578.74 799.21,-578.74 ; R6.2@907.09,-617.52 P13.18 982.28,-607.28 U11.4 ; U9.2 1902.56,-219.49 1965.55,-282.48 2125,-282.48 2142.72,-264.76 U10.4 ; v1(2155.51,-452.76) 2174.21,-452.76 2355.54,-634.08 U6.27
  Bottom Layer w8: P13.18 1165.94,-617.52 1763.94,-19.53 1914.86,-19.53 1936.67,-41.34 1950.79,-41.34 1950.79,-146.65 U9.2 1902.56,-271.98 2095.01,-464.43 2115.16,-464.43 2126.83,-452.76 v1(2155.51,-452.76)
STOP: P11.2 P13.20 | length 1000.7
  Top Layer w8: P13.20 972.05,-827.36 1001.2,-856.52 1054.24,-856.52 1059.38,-851.38 1146.65,-851.38 v1@1175.2,-822.83 ; v1@1475.39,-470.47 1650.59,-645.67 P11.2
  Bottom Layer w8: v1(1177.17,-820.87) 1474.41,-523.62 v1(1474.41,-468.5)
TX: P13.1 P15.4 | length 780.2
  Bottom Layer w8: P13.1 891.62,-1217.52 947.94,-1161.2 998.25,-1161.2 1074.8,-1084.65 P15.4
USBSENSE: C5.2 P2.1 R5.1 R12.1 U3.4 | length 1867.4
  Top Layer w8: v1(450.79,-1150.59) 460.63,-1140.75 R5.1 R12.1@513.78,-1082.68 ; U3.4 C5.2@670.35,-1385.83 ; v1(599.41,-1440.94) U3.4@599.41,-1395.67 ; v1(1185.04,-1344.49) 1256.89,-1272.64 1256.89,-1152.56 1308.47,-1100.98 P2.1
  Bottom Layer w8: v1(450.79,-1150.59) 423.86,-1177.52 355.48,-1177.52 332.05,-1200.95 332.05,-1334.09 355.48,-1357.52 515.98,-1357.52 v1@597.44,-1438.98 ; v1(599.41,-1440.94) v1@597.44,-1438.98 ; v1(1185.04,-1344.49) 1163.39,-1344.49 1130.91,-1312.01 1040.35,-1312.01 994.09,-1358.27 750.98,-1358.27 670.28,-1438.98 v1@597.44,-1438.98
V3.6: C10.2 P15.1 U7.5 | length 196.9
  Top Layer w10: 1133.78,-1433.15 C10.2
  Top Layer w20: P15.1 1131.89,-1419.29 U7.5
V_BATT: C6.2 P7.1 P13.VBat P14.1 U3.3 | length 4640.5
  Top Layer w8: P7.1 137.8,-1475.75 137.8,-865.16 399.61,-865.16 412.05,-852.72 412.05,-800.95 388.62,-777.52 373.98,-777.52 129.92,-533.46 129.92,104.33 153.54,127.95 289.37,127.95 ; 290.94,127.95 472.05,-53.15 P13.VBat
  Top Layer w10: 282.48,-1529.88 C6.2@282.48,-1483.19
  Top Layer w20: P7.1 282.48,-1529.88 458.03,-1529.88 ; P13.VBat@470.47,-115.94 P13.VBat ; U3.3 492.76,-1383.5 458.03,-1383.5 458.03,-1529.88 ; P14.1 1868.43,-1537.08 1819.88,-1585.63 513.78,-1585.63 458.03,-1529.88
VA: C3.1 C16.1 U2.5 U6.5 | length 303.4
  Top Layer w8: C16.1@2554.7,-803.17 U6.5
  Top Layer w12: C16.1 2544.25,-909.41 2577.76,-942.91 C3.1 ; U2.5 C3.1@2575.79,-1003.94
VCC: C19.2 C22.1 C29.1 C30.1 C34.1 P100.4 R1.1 R6.1 R7.2 U8.1 U8.8 U8.13 U8.22 U9.3 U10.2 U12.5 | length 2369.3
  Top Layer w8: v1@428.15,-665.35 436.52,-673.72 U8.22 ; U8.1 514.2,-769.12 680.68,-769.12 682.09,-767.72 C30.1 656.01,-689.47 U8.8 ; U8.13 592.94,-579.16 577.76,-563.98 C29.1 615.16,-539.37 631.89,-522.64 v1(631.89,-499.02) ; v1@831.69,-742.13 R6.1 ; v1@1046.26,-842.52 R1.1 ; C34.1@1637.2,-121.65 U9.3 1873.43,-105.71 1847.44,-79.72 1847.44,-49.21 1882.87,-13.78 1914.37,-13.78 2019.68,-119.09 U10.2 C19.2@2063.98,-41.34 ; 2193.9,-1437.01 2194.39,-1437.5 ; C22.1 2259.84,-1421.26 U12.5
  Top Layer w12: P100.4 1832.01,-1166.66 1994.09,-1328.74 2212.6,-1328.74 U12.5 ; v1(2169.29,-1475.39) 2169.29,-1462.6 2194.39,-1437.5 ; 2193.9,-1437.01 C22.1
  other v1: 1045.28,-833.66 683.07,-766.73 829.72,-744.09 424.21,-666.34
VDDD: C2.1 C13.1 U1.2 U6.30 | length 281.4
  Top Layer w8: U1.2 2398.17,-858.27 2344.26,-804.36 C13.1 2344.26,-707.9 2359.03,-693.14 U6.30
VDDIO: C11.1 C17.1 U5.5 U6.20 | length 330.8
  Top Layer w8: C11.1@2422.24,-365.16 C11.1 U5.5 2496.06,-447.83 2556.1,-507.87 ; U6.20 2554.7,-509.28 2556.1,-507.87 ; C17.1 2556.1,-507.87
VH: C8.1 P9.1 P10.1 P16.1 U4.5 | length 1567
  Top Layer w8: P10.1@2740.16,-998.3 P10.1
  Top Layer w12: P10.1 2812.01,-926.45 2812.01,-694.01 2801.61,-683.62 ; P9.1 2801.61,-683.62 ; P16.1@2960.63,128.94 2834.65,128.94 2814.96,109.25 2814.96,-670.28 2801.61,-683.62
  Top Layer w15: U4.5 P10.1@2740.16,-998.3
VHF: P13.8 Q1.1 | length 3275.3
  Top Layer w8: v1(2588.58,-1423.23) 2588.58,-1492.13 Q1.1
  Bottom Layer w8: P13.8 519.49,-370.08 987.2,-370.08 1012.05,-394.92 1012.05,-434.09 1012.05,-534.09 968.62,-577.52 955.48,-577.52 932.05,-600.95 932.05,-734.09 955.48,-757.52 1071.82,-757.52 1133.72,-819.42 1133.72,-839.38 1102.5,-870.6 1102.5,-889.24 1115.68,-902.42 1134.32,-902.42 1137.69,-899.05 2062.44,-899.05 2471.59,-1308.21 2572.31,-1308.21 2585.49,-1321.39 2585.49,-1422.11 v1@2590.55,-1427.17
VHF_GND: P6.1 Q1.3 | length 80.7
  Top Layer w8: Q1.3 P6.1@2743.11,-1511.81
VIN: C7.1 C20.1 C23.1 C25.1 C26.1 C27.1 P3.2 P4.1 P6.2 P13.Vin P14.2 R9.2 U1.3 U2.1 U2.3 U4.1 U5.1 U5.3 U7.1 U12.1 U12.3 | length 7390.8
  Top Layer w8: P3.2@207.8,-128.08 167.32,-87.6 168.27,-86.65 168.27,77.6 191.43,100.75 224.17,100.75 422.24,-97.32 422.24,-139.76 449.8,-167.32 491.14,-167.32 523.62,-134.84 523.62,26.57 600.39,103.35 R9.2@638.78,103.35 ; P13.Vin 973.43,-1418.9 C20.1 ; C20.1@986.22,-1467.52 U7.1 ; 2305.12,-1573.82 U12.1 ; U12.3 2382.87,-1518.7 2382.87,-1573.82
  Top Layer w10: 2188.98,-1570.87 C23.1 ; C7.1@2436.02,-991.14 U1.3 ; C7.1 2409.45,-994.09 2384.84,-1018.7 v2(2379.92,-1018.7) v2@2379.92,-1024.61 ; U2.1@2476.38,-1068.9 C25.1 v2@2379.92,-1024.61 ; U2.3 2466.54,-1138.78 2439.96,-1165.35 2396.65,-1165.35 2379.92,-1148.62 v2@2379.92,-1024.61 ; v2(2513.78,-1217.52) U4.1 ; U5.3 2673.23,-290.35 2689.96,-307.09 2689.96,-375.98 2685.04,-380.91 C27.1
  Top Layer w20: P3.2 P3.2@207.8,-128.08 ; R9.2@638.78,103.35 R9.2 ; v2(1343.5,-1534.45) 1489.57,-1388.38 P14.2 1668.43,-1329.6 1707.68,-1290.35 1882.87,-1290.35 1942.91,-1350.39 1942.91,-1491.14 2025.59,-1573.82 2305.12,-1573.82 2382.87,-1573.82 2455.71,-1573.82 v2@2498.03,-1531.5 ; v2(2495.08,-1527.56) 2501.97,-1527.56 2552.17,-1577.76 2790.35,-1577.76 2805.12,-1562.99 2805.12,-1473.82 P6.2 ; U5.1 2618.11,-365.16 2633.86,-380.91 ; v2(2601.38,-447.83) U5.1@2601.38,-375.98
  Bottom Layer w20: 106.3,-708.66 108.27,-706.69 ; P3.2 108.27,-238.31 108.27,-706.69 ; v2(1343.5,-1534.45) 1088.98,-1534.45 P13.Vin 972.05,-1470.87 849.41,-1593.5 124.02,-1593.5 108.27,-1577.76 108.27,-706.69
  Bottom Layer w30: P4.1 106.3,-708.66
VSENS: P13.A14 R9.1 R10.2 | length 435.5
  Top Layer w8: R9.1 641.73,37.4 R10.2 704.72,-1.97 723.43,-20.67 723.43,-141.73 754.33,-172.64 816.93,-172.64 P13.A14
pads on no net: P2. P2.4 P13.3.3V P13.3.3V2 P13.A11 P13.AGND P13.AREF P13.GND2 P100.0 P100.1 P100.8 U6.2 U6.4 U6.6 U6.8 U6.9 U6.11 U6.12 U6.16 U6.17 U6.18 U6.19 U6.22 U6.28 U8.2 U8.3 U8.4 U8.5 U8.6 U8.7 U8.12 U8.14 U8.15 U8.16 U8.17 U8.19 U8.21 U9.1 U11.2 U11.5
copper on no net: | length 208.7
  Top Layer w20: 2139.76,69.88 2348.43,69.88

## Polygon pours and split planes (outlines as drawn)
AGND on Internal Plane 1 (split plane): 2813.56,-1592.1 2269.59,-1591.9 2264.82,168.68 2813.56,168.68
DGND on Internal Plane 1 (split plane): 2199.67,-1591.88 123.03,-1591.14 123.03,-40.14 120.08,-37.19 106.71,-37.19 106.71,168.68 2201.75,168.68
VIN on Internal Plane 2 (split plane): 2813.56,-1592.1 2269.6,-1591.9 2265.79,168.68 2813.56,168.68
VCC on Internal Plane 2 (split plane): 2199.68,-1591.88 123.03,-1591.14 123.03,-37.19 106.71,-37.19 106.71,168.68 2202.72,168.68

## Other copper
Internal Plane 1 (plane layer: these items are gaps in the copper):
  pour cut-out: 30.51,-37.19 120.08,-37.19 123.03,-40.14 123.03,-1617.22 32.39,-1617.22 30.51,-1619.09
  pour cut-out: 2264.76,188.98 2201.77,188.78 2199.65,-1612.2 2269.65,-1612.2
Internal Plane 2 (plane layer: these items are gaps in the copper):
  pour cut-out: 30.51,-37.19 123.03,-37.19 123.03,-1618.11 122.05,-1619.09 30.51,-1619.09
  pour cut-out: 2265.75,188.78 2202.76,188.78 2199.65,-1612.2 2269.65,-1612.2

## Silkscreen, mask and mechanical layers (free items; w line width, h text height)
Top Overlay:
  circle w10: c2501.87,-20.33 r20
  circle w10: c1758.86,-1015.75 r579
  circle w10: c1755.91,-1021.65 r450
  lines w10: 62.01,-1572.83 62.01,150.59 ; 1598.43,-319.88 1598.43,158.15 ; 2421.87,-20.33 2501.87,-20.33 ; 2501.87,-16.75 2501.87,68.25
  text "-" at 3225.39,118.11 h60
  text "+" at 2896.65,113.19 h60 r90
  text "X" at 2488.19,62.01 h80 r90
  text "SDA" at 268.7,41.34 h60
  text "Y" at 2385.83,-39.37 h80 r90
  text "v3.0" at 2688.98,-54.13 h60 r90
  text "SCL" at 264.76,-57.09 h60
  text "Z" at 2572.84,-102.36 h80 r90
  text "12" at 294.29,-117.13 h50
  text "13" at 1016.73,-128.94 h50
  text "V" at 114.17,-163.39 h60
  text "14" at 1009.84,-209.65 h50
  text "11" at 298.23,-231.3 h50
  text "AMX" at 2691.93,-260.83 h100 r90
  text "G" at 115.16,-268.7 h60
  text "10" at 293.31,-303.15 h50
  text "15" at 1012.8,-306.1 h50
  text "Loggerhead" at 2801.18,-405.51 h120 r90
  text "9" at 313.98,-406.5 h50
  text "16" at 1010.83,-421.26 h50
  text "+" at -58.07,-479.33 h160 r180
  text "-" at -471.46,-488.19 h160 r180
  text "-" at 2826.77,-488.19 h60 r90
  text "17" at 1009.84,-502.95 h50
  text "8" at 313.98,-503.94 h50
  text "18" at 997.05,-597.44 h50
  text "7" at 313.98,-605.31 h50
  text "+" at 2831.69,-696.85 h60 r90
  text "6" at 313.98,-709.65 h50
  text "STOP" at 1494.09,-725.39 h70 r30
  text "19" at 906.5,-771.65 h50
  text "-" at 2828.74,-789.37 h60 r90
  text "5" at 313.98,-812.01 h50
  text "20" at 892.72,-856.3 h50
  text "A11" at 767.72,-890.75 h50
  text "4" at 315.94,-908.46 h50
  text "4" at 99.41,-947.83 h50
  text "21" at 901.57,-965.55 h50
  text "15" at 1127.95,-976.38 h50
  text "A10" at 768.7,-987.2 h50
  text "+" at 2830.71,-992.13 h60 r90
  text "3" at 316.93,-1005.91 h50
  text "2" at 101.38,-1050.2 h50
  text "22" at 897.64,-1065.94 h50
  text "Tx" at 1126.97,-1078.74 h50
  text "2" at 329.72,-1088.58 h50
  text "G" at 94.49,-1153.54 h60
  text "23" at 900.59,-1166.34 h50
  text "Rx" at 1131.89,-1178.15 h50
  text "1" at 313.98,-1205.71 h50
  text "PGM" at 2159.45,-1221.46 h60 r90
  text "CHARGE" at 636.81,-1246.06 h60
  text "SS" at 93.5,-1260.83 h50
  text "G" at 1137.8,-1271.65 h50
  text "0" at 313.98,-1309.05 h50
  text "SR" at 95.47,-1361.22 h50
  text "OFF" at 1906.5,-1376.97 h70
  text "3.6V" at 1135.83,-1393.7 h50
  text "ON" at 1531.5,-1393.7 h70
  text "G" at 313.98,-1408.46 h50
  text "V" at 2820.87,-1431.1 h60 r90
  text "-" at 92.52,-1432.09 h120 r270
  text "VHF" at 2675.2,-1460.63 h60 r90
  text "Vin" at 887.8,-1471.46 h50
  text "+" at 137.8,-1498.03 h100 r180
  text "G" at 2823.82,-1533.46 h60 r90
  text "D-" at 820.87,-1556.1 h60 r90
  text "D+" at 594.49,-1557.09 h60 r90
  text "BAT" at 251.97,-1586.61 h60
Bottom Overlay:
  text "-" at 3244.84,139.37 h60 r180
  text "+" at 2896.65,113.19 h60 r90
  text "-" at 2684.06,-470.47 h140 r90
  text "L" at 2668.31,-566.93 h100 r90
  text "+" at 2684.06,-722.44 h140
  text "-" at 2717.52,-797.24 h140 r90
  text "R" at 2717.52,-857.28 h100 r90
  text "+" at 2652.56,-1025.59 h140
Mechanical 1:
  lines w10: 3249.21,188.78 2833.66,188.78 86.61,188.78 -99.41,2.76 -99.41,-329.72 -100.39,-330.71 -259.84,-475.39 -577.56,-475.39 -647.64,-545.47 -647.64,-876.97 -584.65,-939.96 -259.84,-939.96 -99.41,-1100.39 -99.41,-1426.18 86.61,-1612.2 2833.66,-1612.2 2833.66,26.57 2875.98,68.9 3256.89,68.9 3270.67,82.68 3270.67,167.32 3250,187.99

## Text inside footprints (layer, text, board x,y; h text height)
C5: Top Overlay "+" at 645.87,-1408.7 h19.68 r180
C6: Top Overlay "+" at 301.42,-1502.76 h19.68 r270
C10: Top Overlay "+" at 1186.77,-1409.65 h19.68 r90
C32: Top Overlay "+" at 1092.28,-697.05 h19.68 r90